# Altium PCB Main.PcbDoc
Units mm, origin at the board's own origin, x right, y up, seen from the top; angles counter-clockwise.
Board outline 50 x 50 mm, 4 copper layers (Top Layer, Ground Layer, Power Layer, Bottom Layer), stack 1.591 mm thick; 26 components, 23 nets, 116 pads, 24 vias.
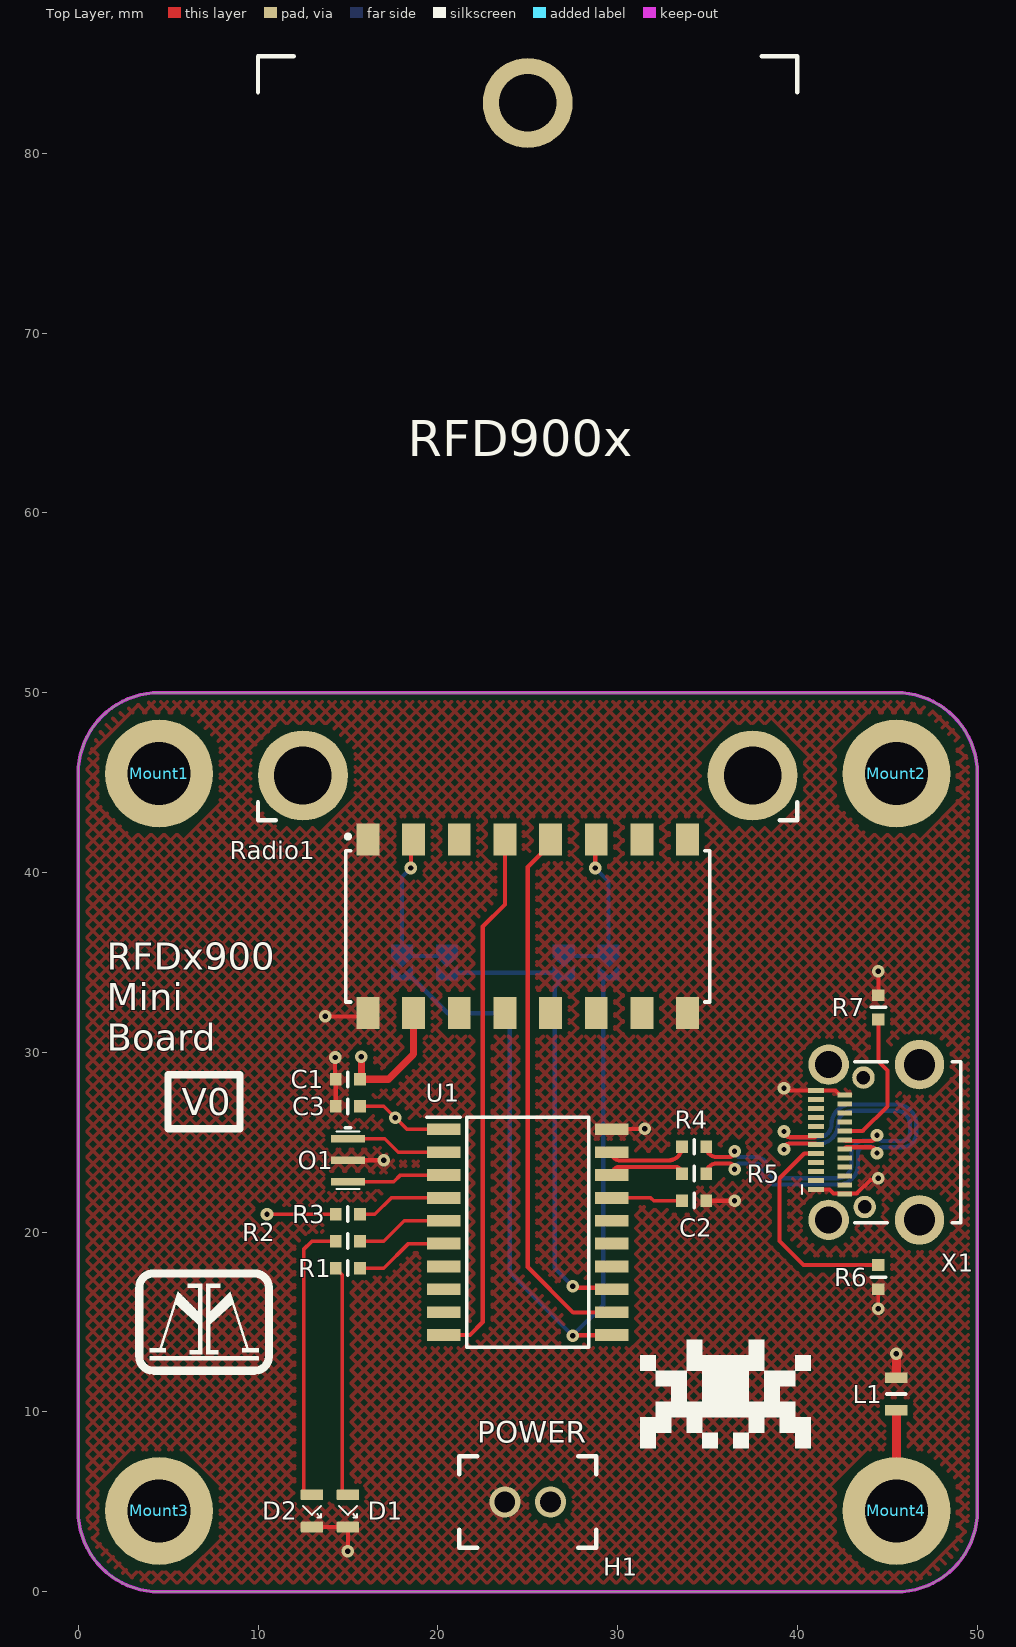
[diagram p0: Top Layer view]
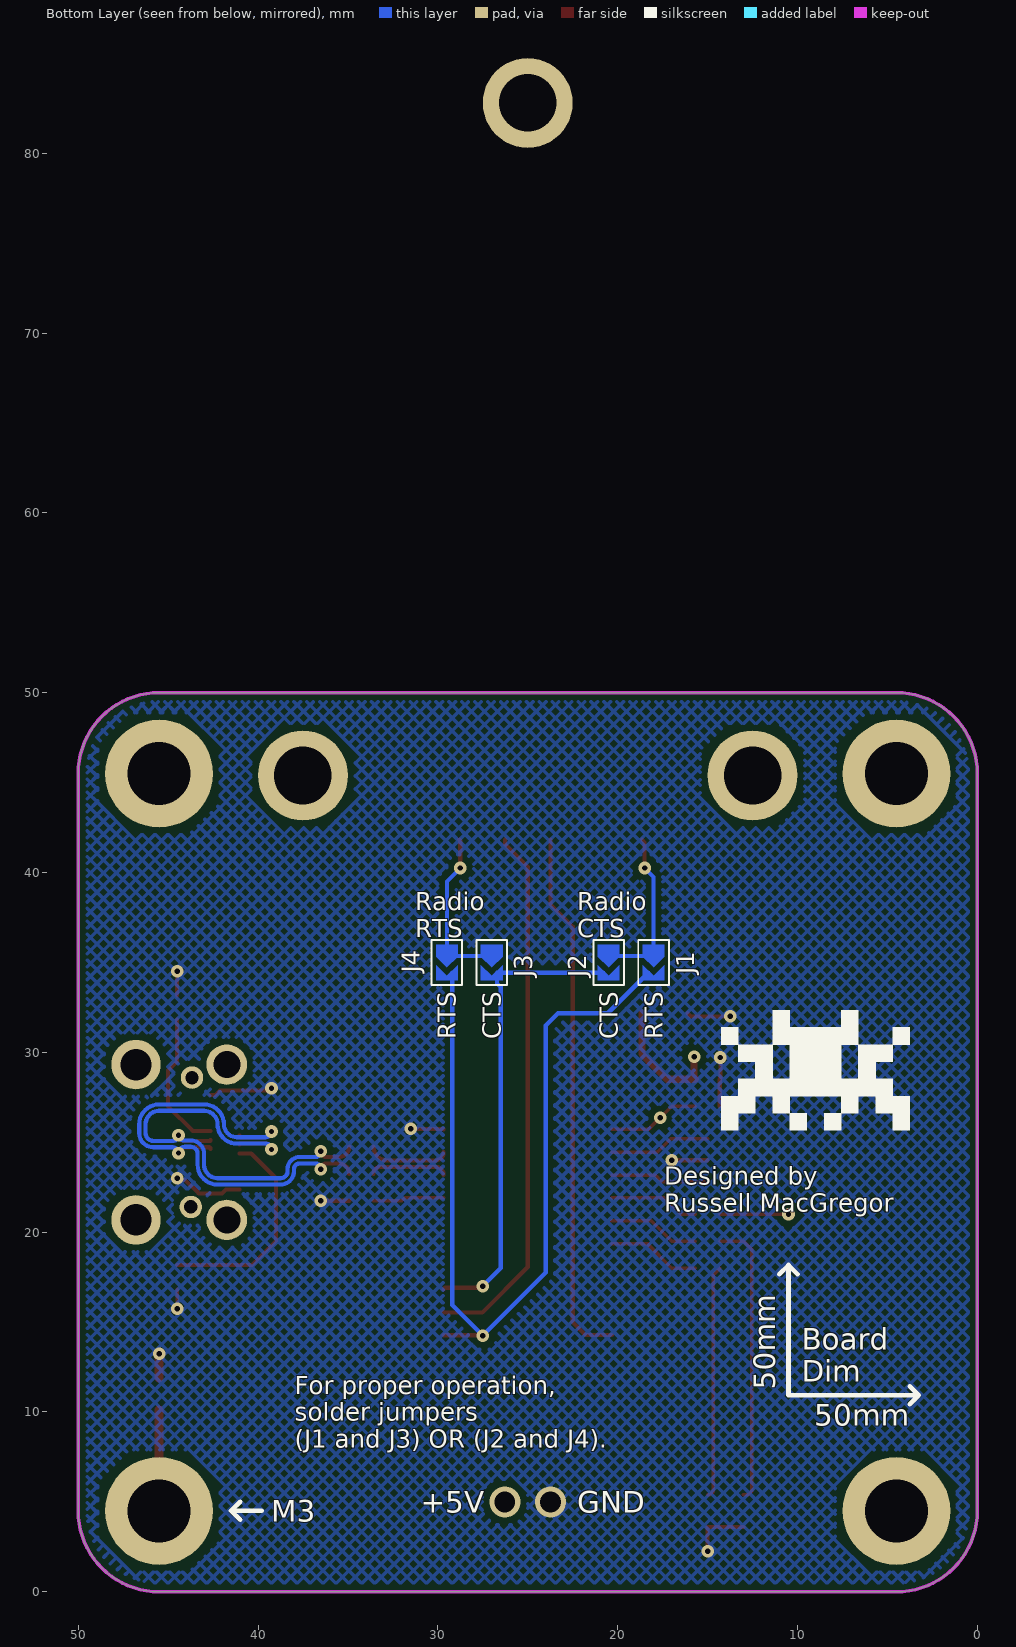
[diagram p1: Bottom Layer view, seen from below]
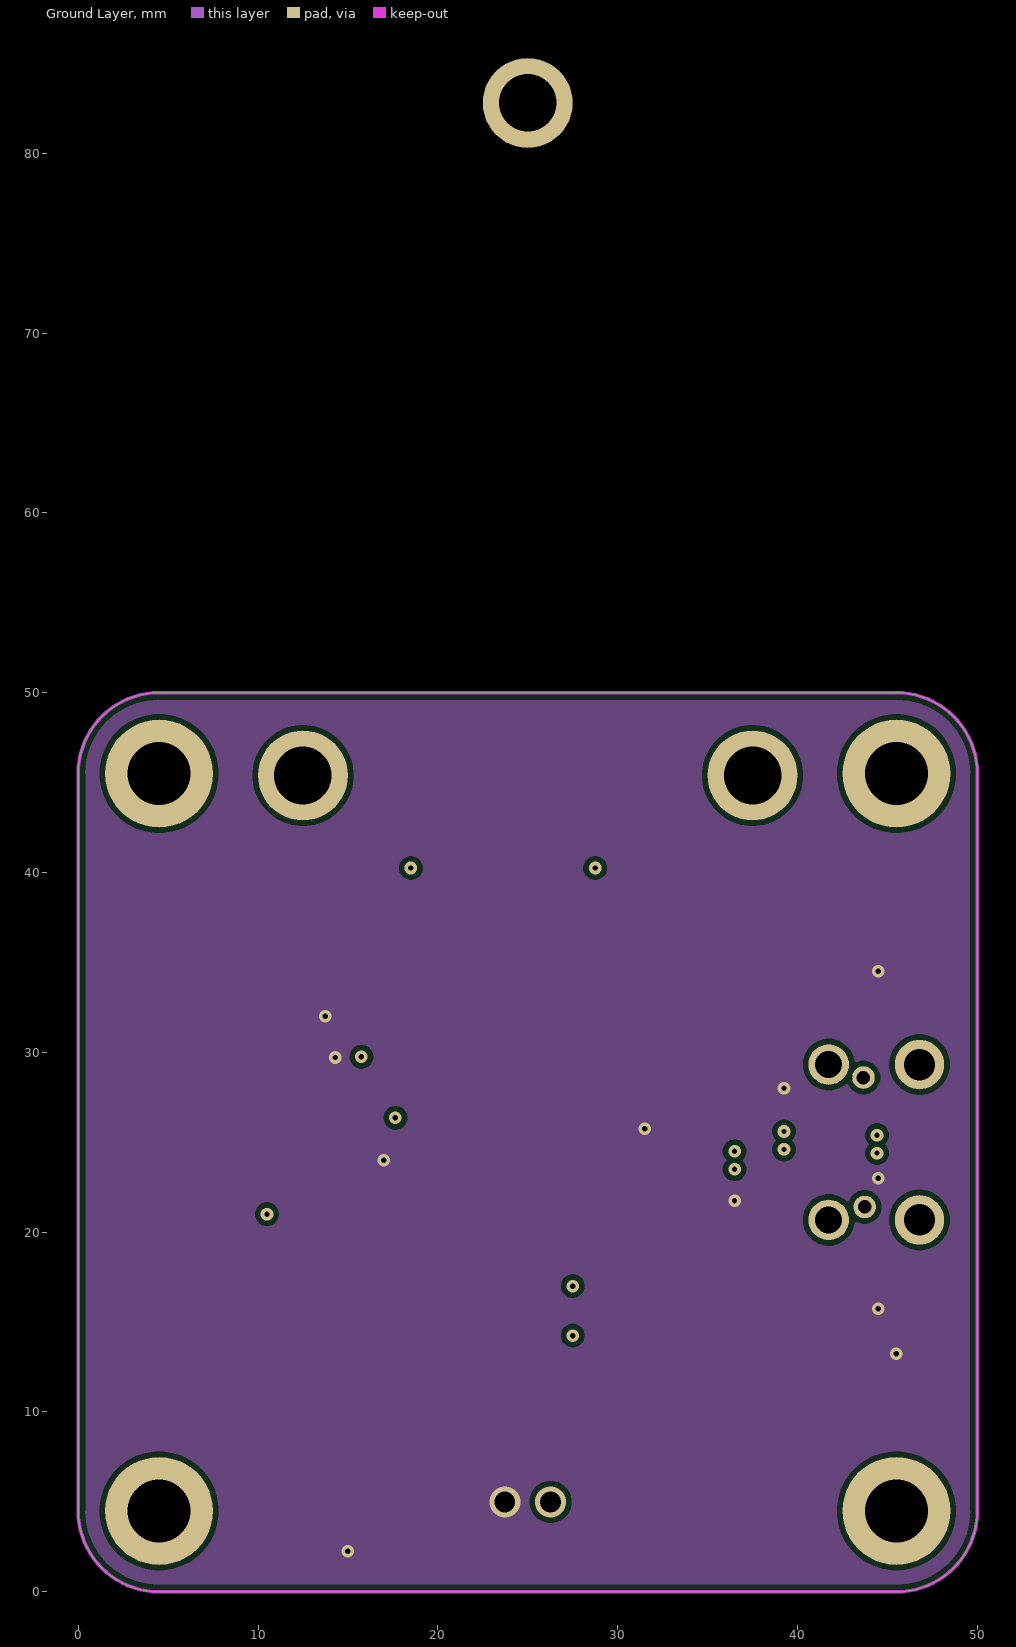
[diagram p2: Ground Layer]
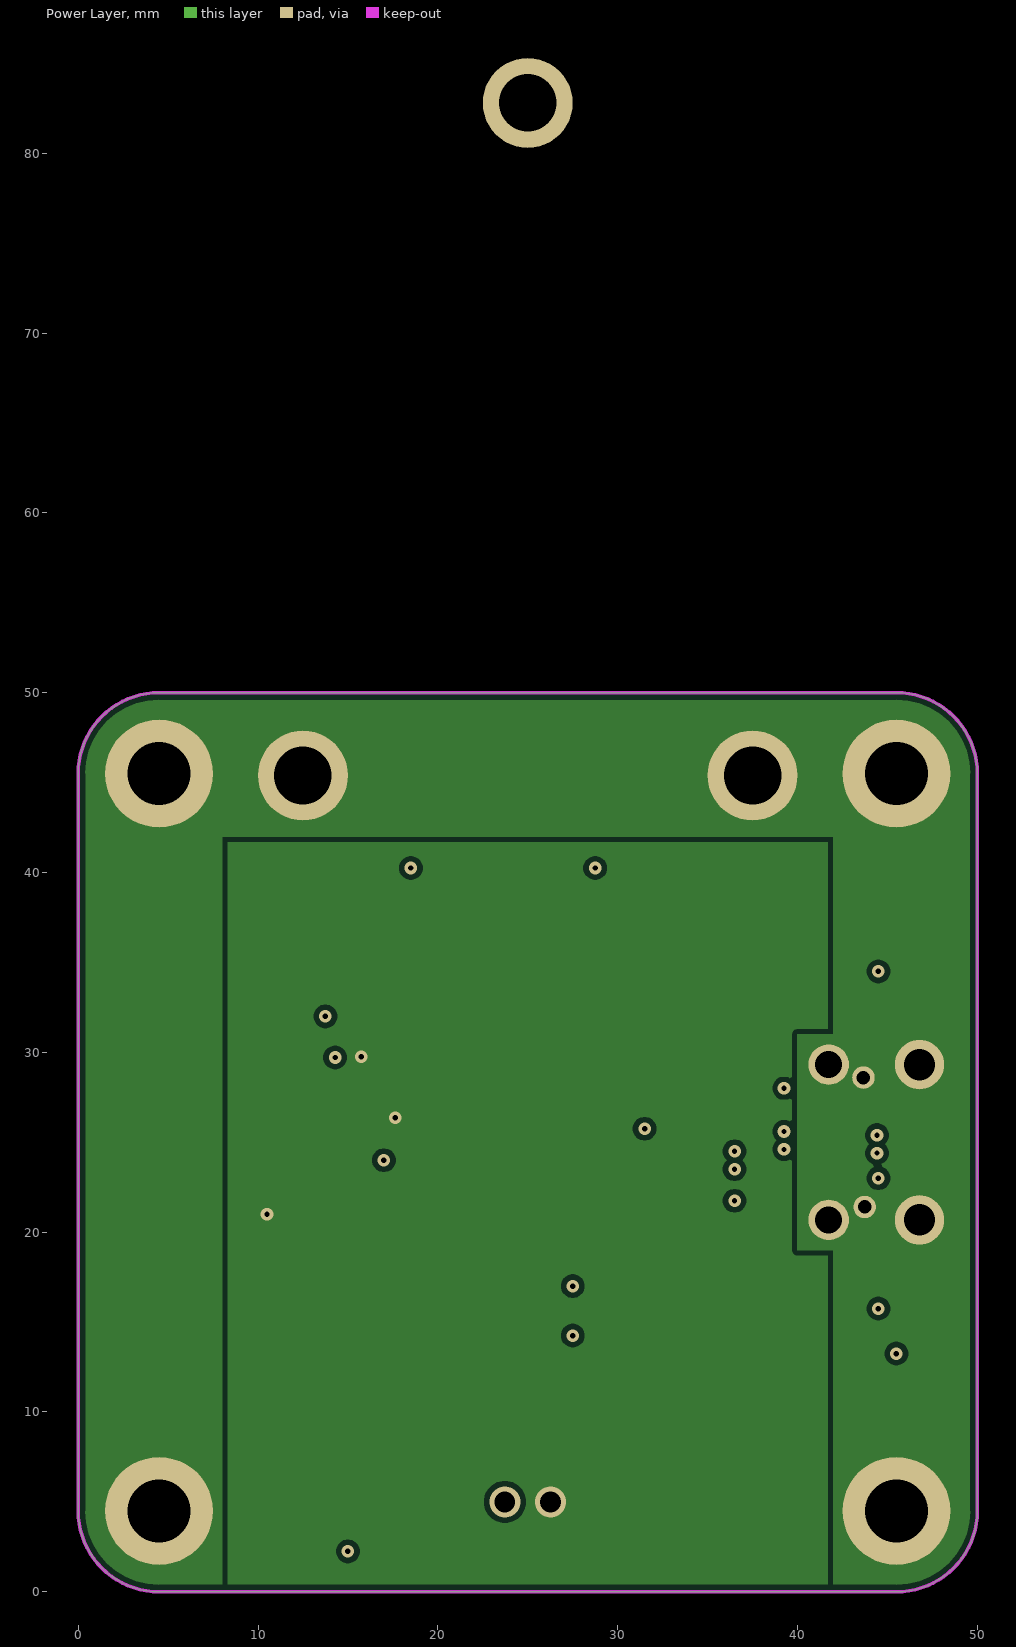
[diagram p3: Power Layer]

## Layer stack, top to bottom
Top Solder: solder mask 0.0102, Solder Resist, Dk 3.8
Top Layer: signal copper 0.035
Dielectric 2: prepreg 0.2104, 7628*1, Dk 4.4
Ground Layer: signal copper 0.0175
Dielectric 1: dielectric 1.065, FR-4, Dk 4.8
Power Layer: signal copper 0.0175
Dielectric 3: prepreg 0.2104, 7628*1, Dk 4.4
Bottom Layer: signal copper 0.035
Bottom Solder: solder mask 0.0102, Solder Resist, Dk 3.8

## Board outline
0,4.5 0,45.5 cw(c4.5,45.5) 4.5,50 45.5,50 cw(c45.5,45.5) 50,45.5 50,4.5 cw(c45.5,4.5) 45.5,0 4.5,0 cw(c4.5,4.5)

## Design rules (kind name [scope] priority, off if disabled: settings)
BoardOutlineClearance [All] p1: gap=0.2 ignorepadtopadclearanceinfootprint=FALSE
Clearance "inPolygon Clearance" [InPolygon] p1: gap=0.3 ignorepadtopadclearanceinfootprint=TRUE // this rule ensures that every net within a polygon of a different net has a set clearance from the poly
Clearance "Different Diff Pair" [All] p2: gap=0.2 ignorepadtopadclearanceinfootprint=TRUE
Clearance "Same Diff Pair" [All] p3: gap=0.1 ignorepadtopadclearanceinfootprint=TRUE
Clearance "Different Nets" [not InAnyDifferentialPair] p4: gap=0.3 ignorepadtopadclearanceinfootprint=TRUE except(0.1: Arc-SMDPad Arc-THPad Arc-Via Arc-Text Track-SMDPad Track-THPad Track-Via Track-Text SMDPad-Text THPad-Text Via-Text Fill-Text Poly-Text Region-Text Text-Text; 0.12: Arc-Arc Arc-Track Track-Track; 0.15: SMDPad-SMDPad SMDPad-THPad SMDPad-Via THPad-THPad THPad-Via Via-Via; 0.2: Arc-Hole Track-Hole SMDPad-Hole THPad-Hole Via-Hole Fill-Hole Poly-Hole Region-Hole Text-Hole)
Clearance "Same Net" [not InAnyDifferentialPair] p5: gap=0 ignorepadtopadclearanceinfootprint=TRUE except(0.1: THPad-Via; 0.18: Arc-Arc Arc-Track Track-Track)
ComponentClearance [All] p1: gap=0.102 collisioncheckmode=3 verticalgap=0.102 showdistances=TRUE
DiffPairsRouting "Ethernet Routing" [InDifferentialPairClass('Ethernet_Pairs')] p1: maxlimit=0.25 minlimit=0.2 mostfreqgap=0.25 toplayer_maxgap=0.2 toplayer_prefgap=0.2 toplayer_minwidth=0.25 toplayer_maxwidth=0.25 toplayer_prefwidth=0.25 midlayer1_mingap=0.25 midlayer1_minwidth=0.19 midlayer1_maxwidth=0.19 midlayer1_prefwidth=0.19 midlayer2_mingap=0.25 midlayer2_minwidth=0.19 midlayer2_maxwidth=0.19 midlayer2_prefwidth=0.19 bottomlayer_maxgap=0.2 bottomlayer_prefgap=0.2 bottomlayer_minwidth=0.25 bottomlayer_maxwidth=0.25 bottomlayer_prefwidth=0.25 impedanceprofiledriven=TRUE maxuncoupledlength=12.7
DiffPairsRouting "USB Routing" [InDifferentialPairClass('USB_Pairs')] p2: maxlimit=0.291 minlimit=0.127 mostfreqgap=0.291 toplayer_maxgap=0.127 toplayer_prefgap=0.127 toplayer_minwidth=0.23 toplayer_maxwidth=0.23 toplayer_prefwidth=0.23 midlayer1_mingap=0.291 midlayer1_minwidth=0.25 midlayer1_maxwidth=0.25 midlayer1_prefwidth=0.25 midlayer2_mingap=0.291 midlayer2_minwidth=0.25 midlayer2_maxwidth=0.25 midlayer2_prefwidth=0.25 bottomlayer_maxgap=0.127 bottomlayer_prefgap=0.127 bottomlayer_minwidth=0.23 bottomlayer_maxwidth=0.23 bottomlayer_prefwidth=0.23 impedanceprofiledriven=TRUE impedanceprofileid={D0C524B4-48A3-44FA-ABE8-8CFBCD4018D9} impedanceprofilevalue=90.000000 maxuncoupledlength=12.7
DiffPairsRouting "CAN Routing" [InDifferentialPairClass('CAN_Pairs')] p3: maxlimit=0.907 minlimit=0.5 mostfreqgap=0.907 toplayer_maxgap=0.5 toplayer_prefgap=0.5 toplayer_minwidth=0.201 toplayer_maxwidth=0.201 toplayer_prefwidth=0.201 midlayer1_mingap=0.907 midlayer1_minwidth=0.155 midlayer1_maxwidth=0.155 midlayer1_prefwidth=0.155 midlayer2_mingap=0.907 midlayer2_minwidth=0.155 midlayer2_maxwidth=0.155 midlayer2_prefwidth=0.155 bottomlayer_maxgap=0.5 bottomlayer_prefgap=0.5 bottomlayer_minwidth=0.201 bottomlayer_maxwidth=0.201 bottomlayer_prefwidth=0.201 impedanceprofiledriven=TRUE maxuncoupledlength=12.7
Height [All] p1: minheight=0 maxheight=1816.048 prefheight=12.7
HoleSize [All] p1: absolutevalues=TRUE maxlimit=6.3 minlimit=0.3 maxpercent=80.000 minpercent=20.000
HoleToHoleClearance [All] p1: gap=0.25 allowstackedmicrovias=FALSE
Length [All] p1: maxlimit=43.432 minlimit=0 usedelayunits=TRUE mindelay=0.000000 maxdelay=10000.000000
MatchedLengths "Diff Pair Matched Delays" [InDifferentialPairClass('Ethernet_Pairs') or InDifferentialPairClass('USB_Pairs') or InDifferentialPairClass('CAN_Pairs')] p1: tolerance=5 checknetsindiffpair=TRUE checkdiffpairvsdiffpair=FALSE checkxsignals=FALSE checkothers=FALSE usedelayunits=TRUE delaytolerance=100.000000
MinimumAnnularRing [All] p1: minimumring=0.2
MinimumSolderMaskSliver [All] p1: minsoldermaskwidth=0
PlaneClearance "Supply Net Clearance" [InNetClass('Supply_Nets')] p1: clearance=0.5
PlaneClearance "All Nets" [All] p2: clearance=0.3
PolygonConnect "Supply Nets" [InNetClass('Supply_Nets')] p1: connectstyle=Direct reliefconductorwidth=0.3 reliefentries=4 polygonreliefangle="90 Angle" airgapwidth=0.254
PolygonConnect General [All] p2: connectstyle=Relief reliefconductorwidth=0.254 reliefentries=4 polygonreliefangle="90 Angle" airgapwidth=0.254
RoutingVias [All] p1: holewidth=0.2 width=0.35 viastyle="Through Hole" minholewidth=0.15 minwidth=0.3 maxholewidth=6.3 maxwidth=6.55
SilkToSilkClearance [All] p1: silktosilkclearance=0
SilkToSolderMaskClearance [All] p1: minsilkscreentomaskgap=0 clearancetoexposedcopper=TRUE
SolderMaskExpansion [All] p1: expansion=0.075 istentingtop=FALSE
SupplyNets "Schematic Supply Nets" [InNet('+5V')] p1: voltage=0.000
SupplyNets "Schematic Supply Nets_3" [InNet('GND')] p2: voltage=0.000
SupplyNets "Schematic Supply Nets_1" [InNet('Earth')] p3: voltage=0.000
UnRoutedNet [All] p1: checkbadconnections=TRUE
Width "nRF Width" [InNetClass('nRF Signal')] p1: maxlimit=0.379 minlimit=0.263 preferedwidth=0.379 toplayer_minwidth=0.379 midlayer1_maxwidth=0.263 midlayer1_prefwidth=0.263 midlayer2_maxwidth=0.263 midlayer2_prefwidth=0.263 bottomlayer_minwidth=0.379 minimp=50.000000 maximp=50.000000 favimp=50.000000 checkconnectedcopper=TRUE
Width [All] p2: maxlimit=100 minlimit=0.1 preferedwidth=0.3
20 further rules are at their usual default settings.

## Classes and differential pairs
differential pair class USB_Pairs: USB_D USB_DX
net class Supply_Nets: +5V Earth GND
differential pair USB_DX: +USB_DX_P -USB_DX_N
differential pair USB_D: +USB_D_P -USB_D_N

## Components (designator, comment, footprint, x,y, rotation, side; value= is the part's Value field where it differs from the comment)
C1 "[Cap] SMD Nonpolarized" "[Cap] SMD 0603" 15,28.5 r0 top
C2 "[Cap] SMD Nonpolarized" "[Cap] SMD 0603" 34.25,21.75 r180 top
C3 "[Cap] SMD Nonpolarized" "[Cap] SMD 0603" 15,27 r0 top
D1 "SMD LED" "[LED] SMD 0805" 15,4.5 r270 top
D2 "SMD LED" "[LED] SMD 0805" 13,4.5 r270 top
H1 "1x2 Male" "[Header] Shrouded 1x2 Male" 25,5 r180 top
J1 "[Jump] SMD Jumper" "[Jumper] Solderable Jumper" 18,35 r270 bottom
J2 "[Jump] SMD Jumper" "[Jumper] Solderable Jumper" 20.5,35 r270 bottom
J3 "[Jump] SMD Jumper" "[Jumper] Solderable Jumper" 27,35 r270 bottom
J4 "[Jump] SMD Jumper" "[Jumper] Solderable Jumper" 29.5,35 r270 bottom
L1 "652-MH2029-300Y" "[Ferrite] SMD Bead 0805 (1)" 45.5,11 r90 top
Mount1 "M3 Mount Hole" "[Mount] M3 Mount Hole" 4.5,45.5 r0 top
Mount2 "M3 Mount Hole" "[Mount] M3 Mount Hole" 45.5,45.5 r90 top
Mount3 "M3 Mount Hole" "[Mount] M3 Mount Hole" 4.5,4.5 r90 top
Mount4 "M3 Mount Hole" "[Mount] M3 Mount Hole" 45.5,4.5 r90 top
O1 "[XOSC] SMD 12MHz" "[XOSC] SMD 12MHz" 15,24 r270 top
R1 "[Res] SMD Resistor" "[Res] SMD 0603" 15,18 r0 top
R2 "[Res] SMD Resistor" "[Res] SMD 0603" 15,19.5 r0 top
R3 "[Res] SMD Resistor" "[Res] SMD 0603" 15,21 r180 top
R4 "[Res] SMD Resistor" "[Res] SMD 0603" 34.25,24.75 r180 top
R5 "[Res] SMD Resistor" "[Res] SMD 0603" 34.25,23.25 r180 top
R6 "[Res] SMD Resistor" "[Res] SMD 0603" 44.5,17.5 r90 top
R7 "[Res] SMD Resistor" "[Res] SMD 0603" 44.5,32.5 r90 top
Radio1 "RFDX900" "[Device] RFDX900 Radio SMD Mount" 25,37 r0 top
U1 "USB-UART Bridge" "[IC] USB-UART Bridge" 25,20 r0 top
X1 "USB-C" "[Port] USB-C" 45,25 r90 top

## Footprints (in the part's own frame and the unit in brackets; to place one, negate y for a bottom-side part, rotate by r counter-clockwise, add the part's x,y. Pads: shape width x height; smd on the part's side, far side on the other; paste and mask are expansions set on the pad)
"[Cap] SMD 0603" [mm]
  rect 0.65x0.7 smd: 1(-0.675,0) 2(0.675,0)
  silkscreen extent 0,-0.4 0,0.4, body extent -0.8,-0.45 0.8,0.45, height 0.8
"[Device] RFDX900 Radio SMD Mount" [mm]
  rect 1.27x1.78 smd paste+0 mask+0.102: 1(-8.89,4.825) 2(-8.89,-4.825) 3(-6.35,4.825) 4(-6.35,-4.825) 5(-3.81,4.825) 6(-3.81,-4.825) 7(-1.27,4.825) 8(-1.27,-4.825) 9(1.27,4.825) 10(1.27,-4.825) 11(3.81,4.825) 12(3.81,-4.825) 13(6.35,4.825) 14(6.35,-4.825) 15(8.89,4.825) 16(8.89,-4.825)
  round 5 hole 3.2: X(-12.5,8.395) X(0,45.795) X(12.5,8.395)
  silkscreen extent -15,-4.2 15,48.4, body extent -15,-5.45 15,100.2, height 12.75
"[Ferrite] SMD Bead 0805 (1)" [mm]
  rect 0.6x1.25 smd: 1(-0.9,0) 2(0.9,0)
  silkscreen extent 0,-0.53 0,0.53, body extent -1,-0.6 1,0.6, height 1.1
"[Header] Shrouded 1x2 Male" [mm]
  round 1.725 hole 1.15: 1(-1.27,0) 2(1.27,0)
  silkscreen extent -3.81,-2.54 3.81,2.54, body extent -3.68,-2.54 3.68,4.06, height 11.71
"[IC] USB-UART Bridge" [mm]
  rect 1.85x0.65 smd: 1(-4.675,5.715) 2(-4.675,4.445) 3(-4.675,3.175) 4(-4.675,1.905) 5(-4.675,0.635) 6(-4.675,-0.635) 7(-4.675,-1.905) 8(-4.675,-3.175) 9(-4.675,-4.445) 10(-4.675,-5.715) 11(4.675,-5.715) 12(4.675,-4.445) 13(4.675,-3.175) 14(4.675,-1.905) 15(4.675,-0.635) 16(4.675,0.635) 17(4.675,1.905) 18(4.675,3.175) 19(4.675,4.445) 20(4.675,5.715)
  silkscreen extent -5.6,-6.4 3.4,6.4, body extent -5.15,-6.4 5.15,6.4, height 2.65
"[Jumper] Solderable Jumper" [mil]
  round 1 smd: 1(-13.78,0) 2(22.64,-11.81) 2(22.64,11.81)
  Top Layer region: 5.91,-23.62 29.53,0 39.37,0 39.37,-23.62
  Top Layer region: 29.53,0 5.91,23.62 39.37,23.62 39.37,0
  Top Layer region: -38.39,-23.62 -12.8,-23.62 10.83,0 -12.8,23.62 -38.39,23.62
  silkscreen extent -49,-33 49,33
"[LED] SMD 0805" [mm]
  rrect20% 0.6x1.25 smd: 1(-0.9,0) 2(0.9,0)
  silkscreen extent -0.28,-0.51 0.37,0.51, body extent -1,-0.65 1,0.65, height 0.8
"[Mount] M3 Mount Hole" [mm] "Place at least 4.5mm from board edge. Plated."
  round 6 hole 3.5: 1(0,0)
"[Port] USB-C" [mm]
  rect 0.27x0.9 smd: A1(-2.625,3.965) A2(-2.125,3.965) A3(-1.625,3.965) A4(-1.125,3.965) A5(-0.625,3.965) A6(-0.125,3.965) A7(0.375,3.965) A8(0.875,3.965) A9(1.375,3.965) A10(1.875,3.965) A11(2.375,3.965) A12(2.875,3.965)
  rect 0.27x0.8 smd: B1(2.625,2.365) B2(2.125,2.365) B3(1.625,2.365) B4(1.125,2.365) B5(0.625,2.365) B6(0.125,2.365) B7(-0.375,2.365) B8(-0.875,2.365) B9(-1.375,2.365) B10(-1.875,2.365) B11(-2.375,2.365) B12(-2.875,2.365)
  round 2.75 hole 1.75: MH(-4.32,-1.785) MH(4.32,-1.785)
  round 2.25 hole 1.5: MH(-4.32,3.265) MH(4.32,3.265)
  round 1.25 hole 0.75: MH(-3.6,1.265) MH(3.6,1.33)
  silkscreen extent -4.47,-4.09 4.47,4.75, body extent -4.51,-4.16 4.43,4.01, height 2.92
"[Res] SMD 0603" [mm]
  rect 0.65x0.7 smd: 1(-0.675,0) 2(0.675,0)
  silkscreen extent 0,-0.4 0,0.4, body extent -0.8,-0.45 0.8,0.45, height 0.8
"[XOSC] SMD 12MHz" [mm]
  rect 0.4x1.9 smd: 1(-1.2,0) 2(0,0) 3(1.2,0)
  silkscreen extent -1.8,-0.65 1.6,0.65, body extent -1.6,-0.65 1.6,0.65, height 0.8

## Part data
C1 C2 C3: Capacitance=100nF, Size Package=0603, Supplier Part Number 1=311-1088-6-ND, Tolerance=5%, Voltage=6.3V, Supplier 1=DigiKey
D1 D2: library part "[LED] SMD", "Generic", Color=Yellow, Size Package=0805, Supplier Part Number 1=3147-B1701UY--20D000214U1930CT-ND, Supplier 1=DigiKey
H1: library part "[Header] Shrouded 1x2 Male", "0705430036 / Mates with 0050579402", Supplier Part Number 1=WM4824-ND, Supplier 1=DigiKey, Supplier 2=DigiKey, Supplier Part Number 2=WM2900-ND
J1 J2 J3 J4: "Solderable jumper"
  J1 J3: NO/NC=NC
  J2 J4: NO/NC=NO
L1: library part "[Ferrite] SMD Ferrite Bead (1)", Res @ Freq="30 @ 100MHz", Size Package=0805, Supplier Part Number 1=MH2029-300YCT-ND, Supplier 1=DigiKey
Mount1 Mount2 Mount3 Mount4: library part "[Mount] M3 Mount Hole", "Place at least 4.5mm from board edge. Plated."
O1: Supplier Part Number 1=490-17947-1-ND, Supplier 1=DigiKey
R1 R2: "Generic", Resistance=1k, Size Package=0603, Supplier Part Number 1=RMCF0603FT1K00DKR-ND, Tolerance=5%, Supplier 1=DigiKey
R3: "Generic", Resistance=10k, Size Package=0603, Supplier Part Number 1=311-10.0KHRDKR-ND, Tolerance=5%, Supplier 1=DigiKey
R4 R5: "Generic", Resistance=27, Size Package=0603, Supplier Part Number 1=749-1631-1-ND, Tolerance=1%, Supplier 1=DigiKey
R6 R7: "Generic", Resistance=5.1k, Size Package=0603, Supplier Part Number 1=311-5.10KHRDKR-ND, Tolerance=1%, Supplier 1=DigiKey
Radio1: library part "[Device] RFDX900 Radio", "RFDX900 Long-Range RF Module", Supplier Part Number 1=609-71609-308LF-ND, Supplier 1=DigiKey
U1: library part "[IC] USB-UART Bridge", "MCP2200T-I/SO", Supplier Part Number 1=MCP2200T-I/SOCT-ND, Supplier 1=DigiKey
X1: library part "[Port] USB Type-C", Supplier Part Number 1=670-3104-1-ND, Supplier 1=DigiKey

## Via types
v1: diameter 0.7, hole 0.3, Top Layer to Bottom Layer, 24 vias

## Nets (pads, with @x,y where several pads share a name; then routed paths per layer and width w, separated by ;. In a path a pad name is that pad's centre, name@x,y a point inside that pad or via, vN(x,y) a via of type N, cw(c..) or ccw(c..) an arc to the next point about the centre after c; other vN are vias at no path point)
+5V: C1.2 C3.2 H1.1 R3.2 Radio1.4 U1.1 | length 16
  Top Layer w0.2: v1(10.5,21) R3.2 ; C3.2 17,27 18.285,25.715 U1.1
  Top Layer w0.4: C1.2 15.75,28.575 v1(15.75,29.75) ; C1.2@15.75,28.5 17.25,28.5 18.65,29.9 Radio1.4
  other v1: 17.642,26.357
Bridge_CTS: J2.2 J3.2 U1.13 | length 27.7
  Top Layer w0.23: v1(27.5,17) 27.588,16.912 29.587,16.912 U1.13
  Bottom Layer w0.1: J2.2@20.2,34.425 20.442,34.183 20.558,34.183 J2.2@20.8,34.425 ; J3.2@26.7,34.425 26.942,34.183 27.058,34.183 J3.2@27.3,34.425
  Bottom Layer w0.23: J2.2@20.8,34.425 26.7,34.425 26.7,33.825 26.5,33.625 26.5,18 v1(27.5,17)
Bridge_RTS: J1.2 J4.2 U1.11 | length 50.3
  Top Layer w0.23: v1(27.5,14.25) 27.518,14.268 29.658,14.268 U1.11
  Bottom Layer w0.1: J1.2@17.7,34.425 17.942,34.183 18.058,34.183 J1.2@18.3,34.425 ; J4.2@29.2,34.425 29.442,34.183 29.558,34.183 J4.2@29.8,34.425
  Bottom Layer w0.23: J1.2@18.3,34.425 20.55,32.175 23.325,32.175 24,31.5 24,17.75 v1(27.5,14.25) 29.2,15.95 J4.2@29.2,34.425
Earth: L1.1 Mount1.1 Mount2.1 Mount3.1 Mount4.1 Radio1.X@12.5,45.395 Radio1.X@37.5,45.395 X1.MH | length 5.6
  Top Layer w0.5: Mount4.1 L1.1
GND: C1.1 C2.1 C3.1 D1.2 D2.2 H1.2 L1.2 O1.2 R6.1 R7.2 Radio1.1 Radio1.2 Radio1.16 U1.20 X1.A1 X1.A12 X1.B1 X1.B12 | length 25.1
  Top Layer w0.2: v1(44.5,15.75) R6.1
  Top Layer w0.23: D2.2 D1.2 v1(15,2.25) ; v1(13.75,32) 15.935,32 Radio1.2 ; v1(14.287,29.712) 14.287,28.537 C1.1 C3.1 ; O1.2 v1(17,24) ; U1.20 29.693,25.732 31.482,25.732 v1(31.5,25.75) ; C2.1 v1(36.5,21.75) ; v1(39.25,28) 39.377,28 39.502,27.875 X1.A12 42.12,27.875 42.37,27.625 X1.B1 ; X1.A1 41.78,22.375 42.01,22.145 42.615,22.145 X1.B12 42.655,22.145 43.292,22.145 44.057,22.91 44.41,22.91 v1(44.5,23) ; R7.2 v1(44.5,34.5)
  Top Layer w0.5: L1.2 v1(45.5,13.25)
NetC2_2: C2.2 U1.17 | length 4
  Top Layer w0.2: U1.17 31.845,21.905 32,21.75 C2.2
NetD1_1: D1.1 R1.1 | length 13
  Top Layer w0.2: R1.1 14.325,17.975 14.55,17.75 14.564,17.75 14.675,17.639 14.675,5.6 14.875,5.4 D1.1
NetD2_1: D2.1 R2.1 | length 16
  Top Layer w0.2: D2.1 12.735,5.4 12.535,5.6 12.535,19.035 13,19.5 R2.1
NetR6_2: R6.2 X1.A5 | length 12.2
  Top Layer w0.23: X1.A5 40.375,24.375 39,23 39,19.5 40.325,18.175 R6.2
NetR7_1: R7.1 X1.B5 | length 8
  Top Layer w0.23: X1.B5 43.625,25.625 45,27 45,29 44.5,29.5 R7.1
OSC1: O1.1 U1.2 | length 5.6
  Top Layer w0.2: O1.1 17.05,25.2 17.805,24.445 U1.2
OSC2: O1.3 U1.3 | length 5.5
  Top Layer w0.2: O1.3 17.55,22.8 17.925,23.175 U1.3
"Radio CTS": J1.1 J2.1 Radio1.3 | length 9.2
  Top Layer w0.23: v1(18.5,40.25) 18.5,41.675 Radio1.3
  Bottom Layer w0.23: v1(18.5,40.25) 18,39.75 J1.1 J2.1
"Radio RTS": J3.1 J4.1 Radio1.11 | length 9.3
  Top Layer w0.23: v1(28.75,40.25) 28.75,41.765 Radio1.11
  Bottom Layer w0.23: J3.1 J4.1 29.5,39.5 v1(28.75,40.25)
"Radio RX": Radio1.7 U1.10 | length 29.8
  Top Layer w0.23: U1.10 21.785,14.285 22.5,15 22.5,37 23.73,38.23 Radio1.7
"Radio TX": Radio1.9 U1.12 | length 30
  Top Layer w0.23: Radio1.9 26.27,41.57 25,40.3 25,18.055 27.528,15.528 29.648,15.528 U1.12
RXLED: R1.2 U1.6 | length 5.2
  Top Layer w0.2: R1.2 17,18 18.365,19.365 U1.6
TXLED: R2.2 U1.5 | length 5.1
  Top Layer w0.2: R2.2 17,19.5 18.135,20.635 U1.5
USB-UART_RESET: R3.1 U1.4 | length 5
  Top Layer w0.2: R3.1 16.5,21 17.405,21.905 U1.4
USB_D_N: R5.1 X1.A7 X1.B7 | length 29.1
  Top Layer w0.23: R5.1 cw(c35.496,23.25) 35.496,23.821 36.179,23.821 cw(c36.179,23.5) v1(36.5,23.5) ; v1(39.25,25.6) ccw(c39.571,25.6) 39.571,25.279 40.939,25.279 ccw(c40.939,25.375) X1.A7 ; X1.B7 cw(c42.731,24.625) 42.731,24.721 44.099,24.721 cw(c44.099,24.4) v1(44.42,24.4)
  Bottom Layer w0.23: v1(36.5,23.5) cw(c36.821,23.5) 36.821,23.821 37.679,23.821 cw(c37.679,23.5) 38,23.5 38,23.393 ccw(c38.75,23.393) 38.75,22.643 42.25,22.643 ccw(c42.25,23.75) 43.357,23.75 43.357,24.357 cw(c43.75,24.357) 43.75,24.75 44.07,24.75 cw(c44.07,24.4) v1(44.42,24.4) cw(c44.741,24.4) 44.741,24.721 45.829,24.721 ccw(c45.829,25.5) 46.607,25.5 46.607,26 ccw(c45.5,26) 45.5,27.107 43,27.107 ccw(c43,26) 41.893,26 cw(c41.171,26) 41.171,25.279 39.571,25.279 cw(c39.571,25.6) v1(39.25,25.6)
USB_D_P: R4.1 X1.A6 X1.B6 | length 27.9
  Top Layer w0.23: R4.1 ccw(c35.496,24.75) 35.496,24.179 36.179,24.179 ccw(c36.179,24.5) v1(36.5,24.5) ; v1(39.25,24.6) cw(c39.571,24.6) 39.571,24.921 40.989,24.921 cw(c40.989,24.875) X1.A6 ; X1.B6 ccw(c42.681,25.125) 42.681,25.079 44.099,25.079 ccw(c44.099,25.4) v1(44.42,25.4)
  Bottom Layer w0.23: v1(36.5,24.5) ccw(c36.821,24.5) 36.821,24.179 37.679,24.179 cw(c37.679,23.5) 38.357,23.5 38.357,23.393 ccw(c38.75,23.393) 38.75,23 42.25,23 ccw(c42.25,23.75) 43,23.75 43,24.357 cw(c43.75,24.357) 43.75,25.107 44.127,25.107 ccw(c44.127,25.4) v1(44.42,25.4) ccw(c44.741,25.4) 44.741,25.079 45.829,25.079 ccw(c45.829,25.5) 46.25,25.5 46.25,26 ccw(c45.5,26) 45.5,26.75 43,26.75 ccw(c43,26) 42.25,26 cw(c41.171,26) 41.171,24.921 39.571,24.921 ccw(c39.571,24.6) v1(39.25,24.6)
USB_DX_N: R5.2 U1.18 | length 4.4
  Top Layer w0.23: U1.18 cw(c30.131,23.175) 30.131,23.631 33.194,23.631 cw(c33.194,23.25) R5.2
USB_DX_P: R4.2 U1.19 | length 4.6
  Top Layer w0.23: U1.19 ccw(c30.131,24.445) 30.131,23.989 32.814,23.989 ccw(c32.814,24.75) R4.2
pads on no net: Radio1.5 Radio1.6 Radio1.8 Radio1.10 Radio1.12 Radio1.13 Radio1.14 Radio1.15 Radio1.X@25,82.795 U1.7 U1.8 U1.9 U1.14 U1.15 U1.16 X1.A2 X1.A3 X1.A4 X1.A8 X1.A9 X1.A10 X1.A11 X1.B2 X1.B3 X1.B4 X1.B8 X1.B9 X1.B10 X1.B11

## Polygon pours and split planes (outlines as drawn)
+5V on Power Layer "+5V Power Poly" (solid, remove dead copper, pour order 1): 42,0 42,19 40,19 40,31 42,31 42,42 8,42 8,0
Earth on Power Layer "Earth Power Poly" (solid, remove dead copper, pour order 0): 50,0 42,0 42,19 40,19 40,31 42,31 42,42 8,42 8,0 0,0 0,50 50,50
GND on Ground Layer "GND Power Poly" (solid, remove dead copper, pour order 2): 0,0 0,50 50,50 50,0
GND on Top Layer "Top GND Poly" (hatched 45Degree grid 0.508 track 0.203, remove dead copper, pour order 3): 0,0 0,50 50,50 50,0
GND on Bottom Layer "Bottom GND Poly" (hatched 45Degree grid 0.508 track 0.203, remove dead copper, pour order 4): 0,0 0,50 50,50 50,0

## Keep-outs
Keep-Out Layer:
  the board outline again, w0.2

## Silkscreen, mask and mechanical layers (free items; w line width, h text height)
Top Overlay:
  drawing of 13 lines, arcs and shapes, not listed
  text "RFDx900 / Mini / Board" at 1.602,30.091 h1.5
  text "V0" at 5.75,26.5 h1.5
  text "POWER" at 22.201,8.3 h1.2
Bottom Overlay:
  region: 6.63,32.341 7.568,32.341 7.568,31.387 10.432,31.387 10.432,32.341 11.386,32.341 11.386,30.432 10.432,30.432 10.432,28.523 11.386,28.523 11.386,30.432 13.295,30.432 13.295,29.479 13.294,29.479 13.294,29.478 12.341,29.478 12.341,28.523 13.294,28.523 13.294,28.522 13.295,28.522 13.295,27.568 14.25,27.568 14.25,25.659 13.295,25.659 13.295,26.614 12.342,26.614 12.342,26.615 12.341,26.615 12.341,27.568 11.386,27.568 11.386,26.615 11.385,26.615 11.385,26.614 10.432,26.614 10.432,27.568 7.568,27.568 7.568,26.614 6.615,26.614 6.615,26.615 6.613,26.615 6.613,27.568 5.659,27.568 5.659,26.615 5.658,26.615 5.658,26.614 4.704,26.614 4.704,25.659 3.75,25.659 3.75,27.568 4.704,27.568 4.704,28.522 4.706,28.522 4.706,28.523 5.659,28.523 5.659,29.478 4.706,29.478 4.706,29.479 4.704,29.479 4.704,30.432 6.613,30.432 6.613,28.523 7.568,28.523 7.568,30.432 6.613,30.432 6.613,32.341 6.629,32.341
  region: 10.432,26.538 10.432,25.659 9.477,25.659 9.477,26.613 9.478,26.613 9.478,26.614 10.432,26.614 10.432,26.539
  region: 13.295,30.726 13.295,31.385 13.296,31.385 13.296,31.387 14.25,31.387 14.25,30.432 13.295,30.432 13.295,30.725
  region: 3.75,31.119 3.75,31.387 4.703,31.387 4.703,31.385 4.704,31.385 4.704,30.432 3.75,30.432 3.75,31.118
  region: 7.925,25.659 7.568,25.659 7.568,26.614 8.521,26.614 8.521,26.613 8.523,26.613 8.523,25.659 7.926,25.659
  lines w0.254: 3.25,10.932 3.758,10.424 ; 3.758,11.432 3.25,10.924 10.5,10.924 10.5,18.174 11.008,17.666 ; 10,17.666 10.508,18.174 ; 39.8,4.5 41.5,4.5 40.992,5.008 ; 40.992,4 41.5,4.508
  text "Radio / CTS" at 22.249,36.4 h1
  text "Radio / RTS" at 31.249,36.4 h1
  text "RTS" at 17.5,30.734 h1 r270
  text "CTS" at 20,30.734 h1 r270
  text "CTS" at 26.5,30.734 h1 r270
  text "RTS" at 29,30.734 h1 r270
  text "Designed by / Russell MacGregor" at 17.422,21.127 h1
  text "Board" at 9.75,13.474 h1.2
  text "Dim" at 9.75,11.674 h1.2
  text "50mm" at 11.25,11.25 h1.2 r270
  text "50mm" at 9.074,9.224 h1.2
  text "For proper operation, / solder jumpers / (J1 and J3) OR (J2 and J4)." at 37.95,8 h1
  text "GND" at 22.25,4.4 h1.2
  text "+5V" at 30.949,4.4 h1.2
  text "M3" at 39.25,3.9 h1.2
Poly Planning:
  lines w0.2: 0,0 8,0 8,42 42,42 42,31 40,31 40,19 42,19 42,0 50,0 50,50 0,50 0,0

## Text inside footprints (layer, text, board x,y; h text height)
Radio1: Top Overlay "RFD900x" at 18.336,63.145 h2